# EAGLE board cornMerge (EAGLE 6.1)
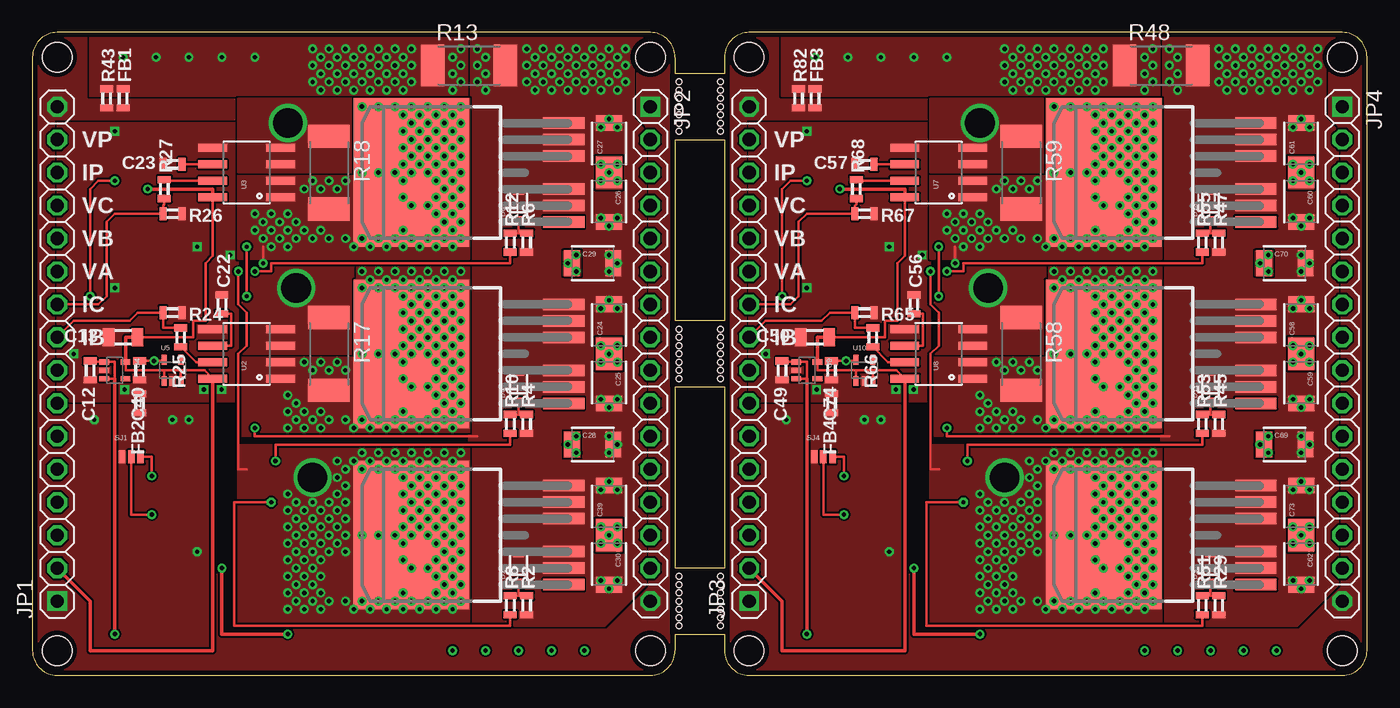
[diagram p0: board, top side]
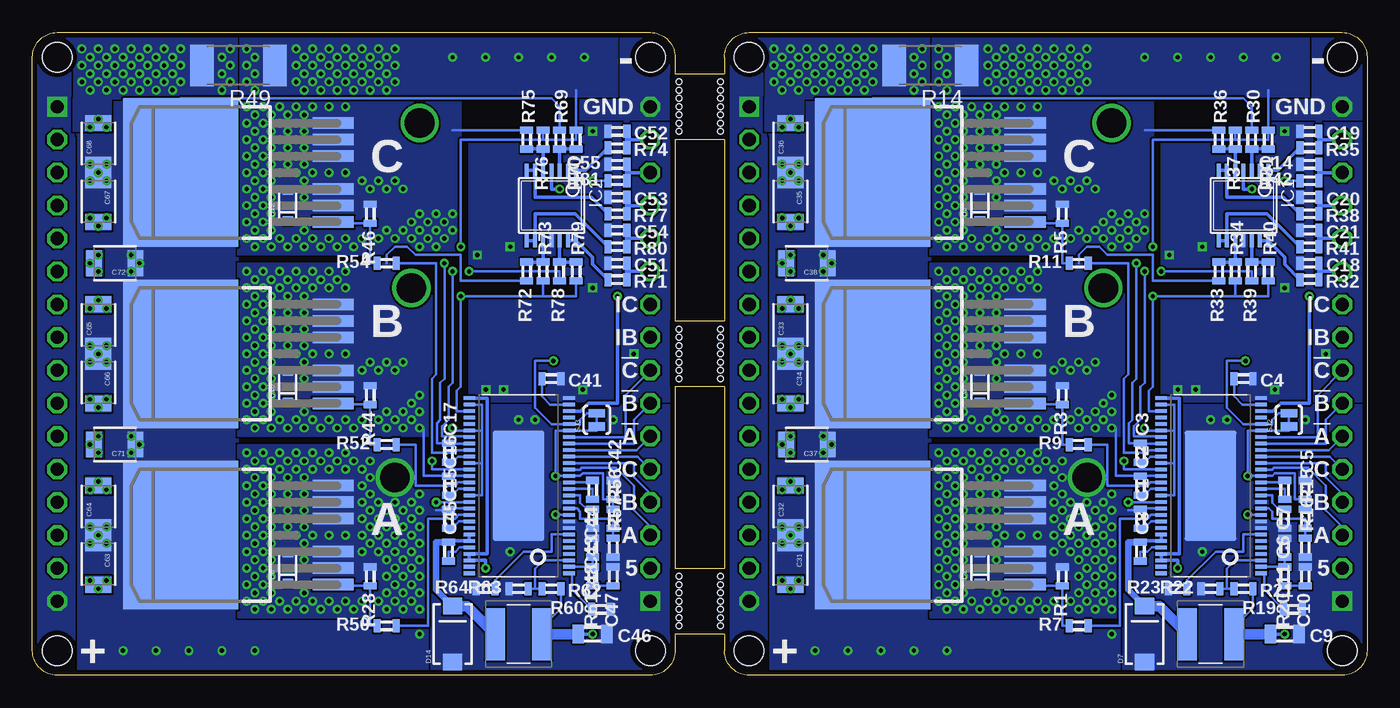
[diagram p1: board, bottom side, seen from below]

Size 102.87 x 49.53 mm. Coordinates in mm from the lower left corner, seen from the top.
Outline: 0,47.62 0,1.91 arc90 1.91,0 47.62,0 arc90 49.53,1.91 49.53,3.17 53.34,3.17 53.34,1.91 arc90 55.24,0 100.97,0 arc90 102.87,1.91 102.87,47.62 arc90 100.97,49.53 55.24,49.53 arc90 53.34,47.62 53.34,46.35 49.53,46.35 49.53,47.62 arc90 47.62,49.53 1.91,49.53 arc90 0,47.62
Outline: 49.53,41.27 53.34,41.27 53.34,27.31 49.53,27.31 49.53,41.27
Outline: 49.53,22.23 53.34,22.23 53.34,8.26 49.53,8.26 49.53,22.23
Copper layers (1*16): Top 0.0356mm / dielectric 1.5011mm / Bottom 0.0356mm
Design rules: minimum track width 6mil, minimum drill 13mil, track to track 6mil, track to pad 6mil, pad to pad 6mil, via to via 6mil, smd to smd 6mil, copper to edge 15mil, drill to drill 6mil, minimum pad ring 7mil, minimum via ring 7mil, stop-mask expansion 4mil, vias tented up to drill 13mil, thermal gap 10mil
Holes 2.29 mm at 1.91,47.62 47.62,47.62 47.62,1.91 1.91,1.91 55.24,47.62 100.97,47.62 100.97,1.91 55.24,1.91
Holes 0.43 mm at 49.85,45.72 49.85,45.09 49.85,44.45 49.85,43.81 49.85,43.18 49.85,42.54 49.85,41.91 53.02,45.72 53.02,44.45 53.02,45.09 53.02,43.81 53.02,43.18 53.02,42.54 53.02,41.91 49.85,26.67 49.85,26.04 49.85,25.4 49.85,24.77 49.85,24.13 49.85,23.5 49.85,22.86 53.02,26.67 53.02,25.4 53.02,26.04 53.02,24.77 53.02,24.13 53.02,23.5 53.02,22.86 49.85,7.62 49.85,6.98 49.85,6.35 49.85,5.71 49.85,5.08 49.85,4.45 49.85,3.81 53.02,7.62 53.02,6.35 53.02,6.98 53.02,5.71 53.02,5.08 53.02,4.45 53.02,3.81
tRestrict: area 49.1,41.3 to 53.7,46.4; area 49.1,22.2 to 53.7,27.3; area 49.1,3.2 to 53.7,8.3
bRestrict: area 49.1,41.3 to 53.7,46.4; area 49.1,22.2 to 53.7,27.3; area 49.1,3.2 to 53.7,8.3

## Footprints (pad centres in the part's own frame; a part is rotated, then mirrored left to right if it is on the bottom)
0603 = smd 0.55 x 1: 1 -0.725,0; 2 0.725,0
0805 = smd 0.9 x 1.4: 1 -1.1,0; 2 1.1,0
1210 = smd 1.2 x 2: 1 -1.6,0; 2 1.6,0
SOD-323 = smd 0.63 x 0.83: 1 -1.15,0; 2 1.15,0
SMA-DIODE = smd 1.27 x 1.47: A -2.15,0; C 2.15,0
TSSOP14 = smd 0.305 x 0.991: 1 -1.905,-2.718; 2 -1.27,-2.718; 3 -0.635,-2.718; 4 0,-2.718; 5 0.635,-2.718; 6 1.27,-2.718; 7 1.905,-2.718; 8 1.905,2.718; 9 1.27,2.718; 10 0.635,2.718; 11 0,2.718; 12 -0.635,2.718; 13 -1.27,2.718; 14 -1.905,2.718
1X16-S = drill 1.016 square: 1 -19.05,0 | drill 1.016 octagon: 2 -16.51,0; 3 -13.97,0; 4 -11.43,0; 5 -8.89,0; 6 -6.35,0; 7 -3.81,0; 8 -1.27,0; 9 1.27,0; 10 3.81,0; 11 6.35,0; 12 8.89,0; 13 11.43,0; 14 13.97,0; 15 16.51,0; 16 19.05,0
TAIYO-YUDEN_NR50 = smd 1.5 x 4: P$1 -1.8,0; P$2 1.8,0
R2512 = smd 1.8 x 3.2: 1 -2.8,0; 2 2.8,0
D2PAK-7 = smd 0.889 x 3.175: 1 -3.81,-7.303; 2 -2.54,-7.303; 3 -1.27,-7.303; 5 1.27,-7.303; 6 2.54,-7.303; 7 3.81,-7.303 | smd 11.43 x 8.89: 4 0,4.445
SJ_X = smd 0.508 x 1.016: 1 -0.711,0; 2 0,0; 3 0.711,0
SJ_2S-TRACE = smd 0.635 x 1.27: 1 -0.508,0; 2 0.508,0
HTSSOP-56 = smd 0.285 x 0.9: 1 -6.75,-3.9; 2 -6.25,-3.9; 3 -5.75,-3.9; 4 -5.25,-3.9; 5 -4.75,-3.9; 6 -4.25,-3.9; 7 -3.75,-3.9; 8 -3.25,-3.9; 9 -2.75,-3.9; 10 -2.25,-3.9; 11 -1.75,-3.9; 12 -1.25,-3.9; 13 -0.75,-3.9; 14 -0.25,-3.9; 15 0.25,-3.9; 16 0.75,-3.9; 17 1.25,-3.9; 18 1.75,-3.9; 19 2.25,-3.9; 20 2.75,-3.9; 21 3.25,-3.9; 22 3.75,-3.9; 23 4.25,-3.9; 24 4.75,-3.9; 25 5.25,-3.9; 26 5.75,-3.9; 27 6.25,-3.9; 28 6.75,-3.9; 29 6.75,3.8; 30 6.25,3.8; 31 5.75,3.8; 32 5.25,3.8; 33 4.75,3.8; 34 4.25,3.8; 35 3.75,3.8; 36 3.25,3.8; 37 2.75,3.8; 38 2.25,3.8; 39 1.75,3.8; 40 1.25,3.8; 41 0.75,3.8; 42 0.25,3.8; 43 -0.25,3.8; 44 -0.75,3.8; 45 -1.25,3.8; 46 -1.75,3.8; 47 -2.25,3.8; 48 -2.75,3.8; 49 -3.25,3.8; 50 -3.75,3.8; 51 -4.25,3.8; 52 -4.75,3.8; 53 -5.25,3.8; 54 -5.75,3.8; 55 -6.25,3.8; 56 -6.75,3.8 | smd 8.5 x 4: PWRPAD 0,0
SO08 = smd 0.61 x 2.21: 1 -1.905,-2.616; 2 -0.635,-2.616; 3 0.635,-2.616; 4 1.905,-2.616; 5 1.905,2.616; 6 0.635,2.616; 7 -0.635,2.616; 8 -1.905,2.616
SC70 = smd 0.4 x 0.75: 1 -0.65,-0.825; 2 0,-0.825; 3 0.65,-0.825; 4 0.65,0.825; 5 -0.65,0.825

## Placement (x,y rotation side)
C1  0.1uF  [0603]  17.46,12.06 90 bottom
C2  0.1uF  [0603]  17.46,14.61 90 bottom
C3  0.1uF  [0603]  17.46,17.15 90 bottom
C4  1uF  [0603]  9.53,22.86 0 bottom
C5  1uF  [0603]  4.76,14.29 90 bottom
C6  2.2uF  [0603]  6.35,12.06 270 bottom
C7  0.022uF  [0603]  6.35,14.29 270 bottom
C8  0.1uF  [0603]  17.46,9.53 90 bottom
C9  22uF  [0805]  6.35,3.17 0 bottom
C10  6800pF  [0603]  4.76,7.62 270 bottom
C11  120pF  [0603]  6.35,9.84 270 bottom
C12  1uF  [0603]  4.45,23.5 270 top
C13  22uF  [0805]  6.98,26.04 180 top
C14  0.1uF  [0603]  4.45,39.37 180 bottom
C15  0.1uF  [0603]  70.8,12.06 90 bottom
C16  0.1uF  [0603]  70.8,14.61 90 bottom
C17  0.1uF  [0603]  70.8,17.15 90 bottom
C18  10000pF  [0603]  4.45,31.75 0 bottom
C19  0.1uF  [0603]  4.45,41.91 0 bottom
C20  10000pF  [0603]  4.45,36.83 0 bottom
C21  10000pF  [0603]  4.45,34.29 0 bottom
C22  0.1uF  [0603]  14.61,28.58 90 top
C23  0.1uF  [0603]  10.79,39.37 180 top
C24  10uF  [1210]  44.45,26.99 90 top
C25  10uF  [1210]  44.45,22.54 270 top
C26  10uF  [1210]  44.45,36.51 270 top
C27  10uF  [1210]  44.45,40.96 90 top
C28  10uF  [1210]  43.18,17.78 0 top
C29  10uF  [1210]  43.18,31.75 0 top
C30  10uF  [1210]  44.45,8.57 270 top
C31  10uF  [1210]  44.45,8.57 270 bottom
C32  10uF  [1210]  44.45,13.02 90 bottom
C33  10uF  [1210]  44.45,26.99 90 bottom
C34  10uF  [1210]  44.45,22.54 270 bottom
C35  10uF  [1210]  44.45,36.51 270 bottom
C36  10uF  [1210]  44.45,40.96 90 bottom
C37  10uF  [1210]  43.18,17.78 180 bottom
C38  10uF  [1210]  43.18,31.75 180 bottom
C39  10uF  [1210]  44.45,13.02 90 top
C40  10uF  [0603]  8.26,23.5 270 top
C41  1uF  [0603]  62.86,22.86 0 bottom
C42  1uF  [0603]  58.1,14.29 90 bottom
C43  2.2uF  [0603]  59.69,12.06 270 bottom
C44  0.022uF  [0603]  59.69,14.29 270 bottom
C45  0.1uF  [0603]  70.8,9.53 90 bottom
C46  22uF  [0805]  59.69,3.17 0 bottom
C47  6800pF  [0603]  58.1,7.62 270 bottom
C48  120pF  [0603]  59.69,9.84 270 bottom
C49  1uF  [0603]  57.78,23.5 270 top
C50  22uF  [0805]  60.32,26.04 180 top
C51  10000pF  [0603]  57.78,31.75 0 bottom
C52  0.1uF  [0603]  57.78,41.91 0 bottom
C53  10000pF  [0603]  57.78,36.83 0 bottom
C54  10000pF  [0603]  57.78,34.29 0 bottom
C55  0.1uF  [0603]  57.78,39.37 180 bottom
C56  0.1uF  [0603]  67.95,28.58 90 top
C57  0.1uF  [0603]  64.14,39.37 180 top
C58  10uF  [1210]  97.79,26.99 90 top
C59  10uF  [1210]  97.79,22.54 270 top
C60  10uF  [1210]  97.79,36.51 270 top
C61  10uF  [1210]  97.79,40.96 90 top
C62  10uF  [1210]  97.79,8.57 270 top
C63  10uF  [1210]  97.79,8.57 270 bottom
C64  10uF  [1210]  97.79,13.02 90 bottom
C65  10uF  [1210]  97.79,26.99 90 bottom
C66  10uF  [1210]  97.79,22.54 270 bottom
C67  10uF  [1210]  97.79,36.51 270 bottom
C68  10uF  [1210]  97.79,40.96 90 bottom
C69  10uF  [1210]  96.52,17.78 0 top
C70  10uF  [1210]  96.52,31.75 0 top
C71  10uF  [1210]  96.52,17.78 180 bottom
C72  10uF  [1210]  96.52,31.75 180 bottom
C73  10uF  [1210]  97.79,13.02 90 top
C74  10uF  [0603]  61.59,23.5 270 top
D1  ZENER  [SOD-323]  29.85,8.26 90 bottom
D2  ZENER  [SOD-323]  37.46,8.26 90 top
D3  ZENER  [SOD-323]  29.85,22.23 90 bottom
D4  ZENER  [SOD-323]  37.46,22.23 90 top
D5  ZENER  [SOD-323]  29.85,36.2 90 bottom
D6  ZENER  [SOD-323]  37.46,36.2 90 top
D7  [SMA-DIODE]  17.15,3.17 90 bottom
D8  ZENER  [SOD-323]  83.19,8.26 90 bottom
D9  ZENER  [SOD-323]  90.81,8.26 90 top
D10  ZENER  [SOD-323]  83.19,22.23 90 bottom
D11  ZENER  [SOD-323]  90.81,22.23 90 top
D12  ZENER  [SOD-323]  83.19,36.2 90 bottom
D13  ZENER  [SOD-323]  90.81,36.2 90 top
D14  [SMA-DIODE]  70.48,3.17 90 bottom
FB1  [0603]  6.98,44.45 90 top
FB2  [0603]  8.26,20.96 270 top
FB3  [0603]  60.32,44.45 90 top
FB4  [0603]  61.59,20.96 270 top
IC1  OPA4743EA  [TSSOP14]  9.53,36.2 180 bottom
IC2  OPA4743EA  [TSSOP14]  62.86,36.2 180 bottom
JP1  [1X16-S]  1.91,24.77 90 top
JP2  [1X16-S]  47.62,24.77 270 top
JP3  [1X16-S]  55.24,24.77 90 top
JP4  [1X16-S]  100.97,24.77 270 top
L1  22uH  [TAIYO-YUDEN_NR50]  12.06,3.17 180 bottom
L2  22uH  [TAIYO-YUDEN_NR50]  65.41,3.17 180 bottom
R1  22k  [0603]  23.5,7.62 270 bottom
R2  22k  [0603]  38.1,5.4 90 top
R3  22k  [0603]  23.5,21.59 270 bottom
R4  22k  [0603]  38.1,19.37 90 top
R5  22k  [0603]  23.5,35.56 270 bottom
R6  22k  [0603]  38.1,33.34 90 top
R7  0R  [0603]  22.23,3.81 180 bottom
R8  0R  [0603]  36.83,5.4 90 top
R9  0R  [0603]  22.23,17.78 180 bottom
R10  0R  [0603]  36.83,19.37 90 top
R11  0R  [0603]  22.23,31.75 180 bottom
R12  0R  [0603]  36.83,33.34 90 top
R13  1mR  [R2512]  33.66,46.99 0 top
R14  1mR  [R2512]  33.66,46.99 180 bottom
R15  91k  [0603]  4.76,12.06 90 bottom
R16  12k  [0603]  4.76,9.84 90 bottom
R17  1mR  [R2512]  22.86,24.77 270 top
R18  1mR  [R2512]  22.86,38.73 270 top
R19  205k  [0603]  5.71,5.08 180 bottom
R20  16.2k  [0603]  6.35,7.62 270 bottom
R21  59k  [0603]  9.53,6.67 0 bottom
R22  10k  [0603]  12.06,6.67 180 bottom
R23  22k  [0603]  14.61,6.67 180 bottom
R24  330R  [0603]  10.79,27.94 0 top
R25  1K  [0603]  11.43,26.04 270 top
R26  330R  [0603]  10.79,35.56 0 top
R27  1K  [0603]  10.16,37.46 90 top
R28  22k  [0603]  76.84,7.62 270 bottom
R29  22k  [0603]  91.44,5.4 90 top
R30  6.8K  [0603]  8.89,41.27 90 bottom
R31  330R  [0603]  7.62,41.27 270 bottom
R32  6.8K  [0603]  4.45,30.48 0 bottom
R33  6.8K  [0603]  11.43,31.12 270 bottom
R34  330R  [0603]  10.16,31.12 90 bottom
R35  6.8K  [0603]  4.45,40.64 0 bottom
R36  6.8K  [0603]  11.43,41.27 90 bottom
R37  330R  [0603]  10.16,41.27 270 bottom
R38  6.8K  [0603]  4.45,35.56 0 bottom
R39  6.8K  [0603]  8.89,31.12 270 bottom
R40  330R  [0603]  7.62,31.12 90 bottom
R41  6.8K  [0603]  4.45,33.02 0 bottom
R42  22k  [0603]  4.45,38.1 180 bottom
R43  [0603]  5.71,44.45 90 top
R44  22k  [0603]  76.84,21.59 270 bottom
R45  22k  [0603]  91.44,19.37 90 top
R46  22k  [0603]  76.84,35.56 270 bottom
R47  22k  [0603]  91.44,33.34 90 top
R48  1mR  [R2512]  87,46.99 0 top
R49  1mR  [R2512]  87,46.99 180 bottom
R50  0R  [0603]  75.57,3.81 180 bottom
R51  0R  [0603]  90.17,5.4 90 top
R52  0R  [0603]  75.57,17.78 180 bottom
R53  0R  [0603]  90.17,19.37 90 top
R54  0R  [0603]  75.57,31.75 180 bottom
R55  0R  [0603]  90.17,33.34 90 top
R56  91k  [0603]  58.1,12.06 90 bottom
R57  12k  [0603]  58.1,9.84 90 bottom
R58  1mR  [R2512]  76.2,24.77 270 top
R59  1mR  [R2512]  76.2,38.73 270 top
R60  205k  [0603]  59.05,5.08 180 bottom
R61  16.2k  [0603]  59.69,7.62 270 bottom
R62  59k  [0603]  62.86,6.67 0 bottom
R63  10k  [0603]  65.41,6.67 180 bottom
R64  22k  [0603]  67.95,6.67 180 bottom
R65  330R  [0603]  64.14,27.94 0 top
R66  1K  [0603]  64.77,26.04 270 top
R67  330R  [0603]  64.14,35.56 0 top
R68  1K  [0603]  63.5,37.46 90 top
R69  6.8K  [0603]  62.23,41.27 90 bottom
R70  330R  [0603]  60.96,41.27 270 bottom
R71  6.8K  [0603]  57.78,30.48 0 bottom
R72  6.8K  [0603]  64.77,31.12 270 bottom
R73  330R  [0603]  63.5,31.12 90 bottom
R74  6.8K  [0603]  57.78,40.64 0 bottom
R75  6.8K  [0603]  64.77,41.27 90 bottom
R76  330R  [0603]  63.5,41.27 270 bottom
R77  6.8K  [0603]  57.78,35.56 0 bottom
R78  6.8K  [0603]  62.23,31.12 270 bottom
R79  330R  [0603]  60.96,31.12 90 bottom
R80  6.8K  [0603]  57.78,33.02 0 bottom
R81  22k  [0603]  57.78,38.1 180 bottom
R82  [0603]  59.05,44.45 90 top
S_AH  D2PAK-7  [D2PAK-7]  33.66,10.79 90 bottom
S_AH1  D2PAK-7  [D2PAK-7]  87,10.79 90 bottom
S_AL  D2PAK-7  [D2PAK-7]  33.66,10.79 90 top
S_AL1  D2PAK-7  [D2PAK-7]  87,10.79 90 top
S_BH  D2PAK-7  [D2PAK-7]  33.66,24.77 90 bottom
S_BH1  D2PAK-7  [D2PAK-7]  87,24.77 90 bottom
S_BL  D2PAK-7  [D2PAK-7]  33.66,24.77 90 top
S_BL1  D2PAK-7  [D2PAK-7]  87,24.77 90 top
S_CH  D2PAK-7  [D2PAK-7]  33.66,38.73 90 bottom
S_CH1  D2PAK-7  [D2PAK-7]  87,38.73 90 bottom
S_CL  D2PAK-7  [D2PAK-7]  33.66,38.73 90 top
S_CL1  D2PAK-7  [D2PAK-7]  87,38.73 90 top
SJ1  [SJ_X]  7.62,16.83 0 top
SJ2  [SJ_2S-TRACE]  6.03,19.69 90 bottom
SJ3  [SJ_2S-TRACE]  59.37,19.69 90 bottom
SJ4  [SJ_X]  60.96,16.83 0 top
U1  DRV8302  [HTSSOP-56]  12.06,14.61 90 bottom
U2  ACS712  [SO08]  16.51,24.77 90 top
U3  ACS712  [SO08]  16.51,38.73 90 top
U4  V_REG_LDOSMD2  [SC70]  6.35,23.5 270 top
U5  V_REG_LDOSMD2  [SC70]  10.79,23.5 0 top
U6  DRV8302  [HTSSOP-56]  65.41,14.61 90 bottom
U7  ACS712  [SO08]  69.85,38.73 90 top
U8  ACS712  [SO08]  69.85,24.77 90 top
U9  V_REG_LDOSMD2  [SC70]  59.69,23.5 270 top
U10  V_REG_LDOSMD2  [SC70]  64.14,23.5 0 top

## Library data of the parts
C1-C23 C40-C57 C74 FB1-FB4 R1-R12 R15 R16 R19-R47 R50-R57 R60-R82 = dan-rcl
C24-C39 C58-C73 D1-D14 R13 R14 R17 R18 R48 R49 R58 R59 SJ2 SJ3 U2-U5 U7-U10 = SparkFun
IC1 IC2 = linear
JP1-JP4 = pinhead-2
L1 L2 S_AH S_AH1 S_AL S_AL1 S_BH S_BH1 S_BL S_BL1 S_CH S_CH1 S_CL S_CL1 SJ1 SJ4 U1 U6 = xow

## Nets
!PWM_A: JP1.4 U1.18
!PWM_A1: JP3.4 U6.18
!PWM_B: JP1.6 U1.20
!PWM_B1: JP3.6 U6.20
!PWM_C: JP1.8 U1.22
!PWM_C1: JP3.8 U6.22
+3V1: C74.1 SJ3.2 U6.24 U10.5
+3V3: C40.1 SJ2.2 U1.24 U5.5
+5V: C13.1 IC1.4 JP1.2 U2.8 U3.8 U4.5 U5.1 U5.3
+5V1: C50.1 IC2.4 JP3.2 U7.8 U8.8 U9.5 U10.1 U10.3
AGND: C4.2 C12.2 C13.2 C14.2 C18.1 C19.1 C20.1 C21.1 C22.2 C23.2 C40.2 FB2.1 IC1.11 R24.2 R26.2 U1.28 U2.5 U3.5 U4.2 U5.2
AGND1: C41.2 C49.2 C50.2 C51.1 C52.1 C53.1 C54.1 C55.2 C56.2 C57.2 C74.2 FB4.1 IC2.11 R65.2 R67.2 U6.28 U7.5 U8.5 U9.2 U10.2
GND: C5.2 C6.2 C9.2 C10.1 C11.1 D7.A FB1.1 FB2.2 JP1.1 JP1.16 JP2.1 JP2.16 R16.1 R19.1 R22.2 R23.2 R43.1 SJ1.1 U1.8 U1.9 U1.12 U1.PWRPAD
GND2: C42.2 C43.2 C46.2 C47.1 C48.1 D14.A FB3.1 FB4.2 JP3.1 JP3.16 JP4.1 JP4.16 R57.1 R60.1 R63.2 R64.2 R82.1 SJ4.1 U6.8 U6.9 U6.12 U6.PWRPAD
I_A: JP1.9 R24.1 R25.1
I_A1: JP3.9 R65.1 R66.1
I_B: JP1.10 R26.1 R27.1
I_B1: JP3.10 R67.1 R68.1
I_B_5V: R25.2 U2.7
I_B_5V1: R66.2 U8.7
I_C_5V: R27.2 U3.7
I_C_5V1: R68.2 U7.7
I_P: C14.1 JP1.14 R42.1
I_P1: C55.1 JP3.14 R81.1
M_A: C1.2 D1.2 R1.1 R39.2 S_AH.2 S_AH.3 S_AH.5 S_AH.6 S_AH.7 S_AL.4 U1.46
M_A1: C15.2 D8.2 R28.1 R78.2 S_AH1.2 S_AH1.3 S_AH1.5 S_AH1.6 S_AH1.7 S_AL1.4 U6.46
M_B: R17.1 U2.3 U2.4
M_B1: R58.1 U8.3 U8.4
M_C: R18.1 U3.3 U3.4
M_C1: R59.1 U7.3 U7.4
N$1: R7.1 U1.47
N$2: R8.1 U1.45
N$3: R42.2 U1.26
N$4: D1.1 R1.2 R7.2 S_AH.1
N$5: D3.1 R3.2 R9.2 S_BH.1
N$6: C22.1 U2.6
N$7: D4.1 R4.2 R10.2 S_BL.1
N$8: R21.1 R22.1 U1.3
N$9: D5.1 R5.2 R11.2 S_CH.1
N$10: C23.1 U3.6
N$11: D6.1 R6.2 R12.2 S_CL.1
N$12: R9.1 U1.42
N$13: C1.1 U1.48
N$14: C2.1 U1.43
N$15: C3.1 U1.38
N$16: R10.1 U1.40
N$17: R11.1 U1.37
N$18: D2.1 R2.2 R8.2 S_AL.1
N$19: R12.1 U1.35
N$20: SJ1.2 U1.10
N$21: C5.1 R15.2 SJ1.3 SJ2.1 U1.16 U1.23
N$22: C4.1 U1.27
N$23: C6.1 U1.13
N$24: C7.2 U1.14
N$25: C7.1 U1.15
N$26: R15.1 R16.2 U1.11
N$27: D8.1 R28.2 R50.2 S_AH1.1
N$28: D10.1 R44.2 R52.2 S_BH1.1
N$29: C8.2 D7.C L1.P$2 U1.50 U1.51
N$30: C8.1 U1.52
N$31: C11.2 R20.1 U1.2
N$32: C10.2 R20.2
N$33: R19.2 U1.1
N$34: R23.1 U1.7
N$35: D11.1 R45.2 R53.2 S_BL1.1
N$36: IC1.1 IC1.2 R35.1
N$37: D12.1 R46.2 R54.2 S_CH1.1
N$38: D13.1 R47.2 R55.2 S_CL1.1
N$39: C15.1 U6.48
N$40: C16.1 U6.43
N$41: IC1.6 IC1.7 R38.1
N$42: IC1.8 IC1.9 R41.1
N$43: IC1.13 IC1.14 R32.1
N$44: IC1.3 R30.1 R31.2
N$45: C17.1 U6.38
N$46: IC1.10 R33.1 R34.2
N$47: IC1.5 R36.1 R37.2
N$48: IC1.12 R39.1 R40.2
N$49: D9.1 R29.2 R51.2 S_AL1.1
N$50: R50.1 U6.47
N$51: R51.1 U6.45
N$52: R52.1 U6.42
N$53: R53.1 U6.40
N$54: R54.1 U6.37
N$55: R55.1 U6.35
N$56: SJ4.2 U6.10
N$57: C42.1 R56.2 SJ3.1 SJ4.3 U6.16 U6.23
N$58: C41.1 U6.27
N$59: C43.1 U6.13
N$60: C44.2 U6.14
N$61: C44.1 U6.15
N$62: R56.1 R57.2 U6.11
N$63: C45.2 D14.C L2.P$2 U6.50 U6.51
N$64: C45.1 U6.52
N$65: C48.2 R61.1 U6.2
N$66: C47.2 R61.2
N$67: R60.2 U6.1
N$68: R62.1 R63.1 U6.3
N$69: R64.1 U6.7
N$70: IC2.1 IC2.2 R74.1
N$71: IC2.6 IC2.7 R77.1
N$72: IC2.8 IC2.9 R80.1
N$73: IC2.13 IC2.14 R71.1
N$74: IC2.3 R69.1 R70.2
N$75: IC2.10 R72.1 R73.2
N$76: IC2.5 R75.1 R76.2
N$77: IC2.12 R78.1 R79.2
N$78: R81.2 U6.26
N$79: C56.1 U8.6
N$80: C57.1 U7.6
PWM_A: JP1.3 U1.17
PWM_A1: JP3.3 U6.17
PWM_B: JP1.5 U1.19
PWM_B1: JP3.5 U6.19
PWM_C: JP1.7 U1.21
PWM_C1: JP3.7 U6.21
R_B: C2.2 D3.2 R3.1 R17.2 R33.2 S_BH.2 S_BH.3 S_BH.5 S_BH.6 S_BH.7 S_BL.4 U1.41 U2.1 U2.2
R_B1: C16.2 D10.2 R44.1 R58.2 R72.2 S_BH1.2 S_BH1.3 S_BH1.5 S_BH1.6 S_BH1.7 S_BL1.4 U6.41 U8.1 U8.2
R_C: C3.2 D5.2 R5.1 R18.2 R36.2 S_CH.2 S_CH.3 S_CH.5 S_CH.6 S_CH.7 S_CL.4 U1.36 U3.1 U3.2
R_C1: C17.2 D12.2 R46.1 R59.2 R75.2 S_CH1.2 S_CH1.3 S_CH1.5 S_CH1.6 S_CH1.7 S_CL1.4 U6.36 U7.1 U7.2
V+: C24.1 C25.1 C26.1 C27.1 C28.1 C29.1 C30.1 C31.1 C32.1 C33.1 C34.1 C35.1 C36.1 C37.1 C38.1 C39.1 R30.2 S_AH.4 S_BH.4 S_CH.4 U1.29 U1.53 U1.54
V+1: C58.1 C59.1 C60.1 C61.1 C62.1 C63.1 C64.1 C65.1 C66.1 C67.1 C68.1 C69.1 C70.1 C71.1 C72.1 C73.1 R69.2 S_AH1.4 S_BH1.4 S_CH1.4 U6.29 U6.53 U6.54
V-: FB1.2 R13.1 R14.1 R31.1 R34.1 R37.1 R40.1 R43.2 U1.31
V-1: FB3.2 R48.1 R49.1 R70.1 R73.1 R76.1 R79.1 R82.2 U6.31
V_A: C18.2 JP1.11 R32.2
V_A1: C51.2 JP3.11 R71.2
V_B: C21.2 JP1.12 R41.2
V_B1: C54.2 JP3.12 R80.2
V_C: C20.2 JP1.13 R38.2
V_C1: C53.2 JP3.13 R77.2
V_LOW: C24.2 C25.2 C26.2 C27.2 C28.2 C29.2 C30.2 C31.2 C32.2 C33.2 C34.2 C35.2 C36.2 C37.2 C38.2 C39.2 D2.2 D4.2 D6.2 R2.1 R4.1 R6.1 R13.2 R14.2 S_AL.2 S_AL.3 S_AL.5 S_AL.6 S_AL.7 S_BL.2 S_BL.3 S_BL.5 S_BL.6 S_BL.7 S_CL.2 S_CL.3 S_CL.5 S_CL.6 S_CL.7 U1.30 U1.34 U1.39 U1.44
V_LOW1: C58.2 C59.2 C60.2 C61.2 C62.2 C63.2 C64.2 C65.2 C66.2 C67.2 C68.2 C69.2 C70.2 C71.2 C72.2 C73.2 D9.2 D11.2 D13.2 R29.1 R45.1 R47.1 R48.2 R49.2 S_AL1.2 S_AL1.3 S_AL1.5 S_AL1.6 S_AL1.7 S_BL1.2 S_BL1.3 S_BL1.5 S_BL1.6 S_BL1.7 S_CL1.2 S_CL1.3 S_CL1.5 S_CL1.6 S_CL1.7 U6.30 U6.34 U6.39 U6.44
V_P: C19.2 JP1.15 R35.2
V_P1: C52.2 JP3.15 R74.2
VCC: C9.1 C12.1 L1.P$1 R21.2 U4.1 U4.3
VCC1: C46.1 C49.1 L2.P$1 R62.2 U9.1 U9.3

## Tracks (layer width: path | path; a pad name or v marks a point on that pad's centre or on a via)
!PWM_A
  Bottom 0.203: JP1.4 1.91,13.97 3.17,15.24 3.17,16.36 U1.18 7.3,16.36
!PWM_A1
  Bottom 0.203: JP3.4 55.24,13.97 56.52,15.24 56.52,16.36 U6.18 60.64,16.36
!PWM_B
  Bottom 0.203: JP1.6 2.96,17.36 U1.20
!PWM_B1
  Bottom 0.203: JP3.6 56.3,17.36 U6.20
!PWM_C
  Bottom 0.203: JP1.8 3.81,21.59 3.81,18.36 U1.22
!PWM_C1
  Bottom 0.203: JP3.8 57.15,21.59 57.15,18.36 U6.22
+3V1  (via drill 0.33)
  Top 0.203: C74.1 v62.71,24.22 63.48,24.22 U10.5
  Bottom 0.203: v62.71,24.22 64.14,24.22 64.14,20.62 62.86,19.36 U6.24 60.64,19.36 60.64,19.69 60.13,20.19 SJ3.2
+3V3  (via drill 0.33)
  Top 0.203: C40.1 v9.37,24.22 10.14,24.22 U5.5
  Bottom 0.203: v9.37,24.22 10.79,24.22 10.79,20.62 9.53,19.36 U1.24 7.3,19.36 7.3,19.69 6.79,20.19 SJ2.2
+5V  (via drill 0.33)
  Top 0.203: U4.5 7.17,23.5 10.14,23.5 | U2.8 13.26,23.5 11.45,23.5 | C13.1 12.38,26.04 12.38,27.31 13.33,27.31 13.33,31.75 13.89,32.31 U3.8 | 10.14,23.5 U5.1 | 10.14,23.5 11.45,23.5 | 11.45,23.5 U5.3
  Top 0.254: JP1.2 4.45,5.71 4.45,1.91 13.89,1.91 U2.8 | U3.8 13.89,37.46 v8.89,37.46 | C13.1 7.17,26.04 U4.5
  Bottom 0.254: IC1.4 9.53,37.46 v8.89,37.46
+5V1  (via drill 0.33)
  Top 0.203: U9.5 60.52,23.5 63.48,23.5 | U8.8 66.6,23.5 64.79,23.5 | C50.1 65.72,26.04 65.72,27.31 66.68,27.31 66.68,31.75 67.23,32.31 U7.8 | 63.48,23.5 U10.1 | 63.48,23.5 64.79,23.5 | 64.79,23.5 U10.3
  Top 0.254: JP3.2 57.78,5.71 57.78,1.91 67.23,1.91 U8.8 | U7.8 67.23,37.46 v62.23,37.46 | C50.1 60.52,26.04 U9.5
  Bottom 0.254: IC2.4 62.86,37.46 v62.23,37.46
AGND  (via drill 0.33)
  other vias: 3.17,24.77 15.24,32.38 12.7,33.02 6.35,29.85 6.35,41.91 7.11,22.01 14.58,22.02 13.21,22.02
  pour Bottom (rank 5, no thermals): 0,42.54 15.88,42.54 15.88,21.11 0,21.11
  pour Top (rank 5, no thermals): 1.91,42.54 1.91,21.11 15.88,21.11 15.88,42.54
AGND1  (via drill 0.33)
  other vias: 56.52,24.77 68.58,32.38 66.04,33.02 59.69,29.85 59.69,41.91 60.45,22.01 67.92,22.02 66.55,22.02
  pour Bottom (rank 5, no thermals): 53.34,42.54 69.22,42.54 69.22,21.11 53.34,21.11
  pour Top (rank 5, no thermals): 55.24,42.54 55.24,21.11 69.22,21.11 69.22,42.54
GND  (via drill 0.33)
  other vias: 12.7,9.53 12.06,19.69 10.79,19.69 4.76,19.69
  pour Bottom (rank 6, no thermals): 47.62,0 1.91,0 arc-90 0,1.91 0,47.62 arc-90 1.91,49.53 47.62,49.53 arc-90 49.53,47.62 49.53,1.91 arc-90
  pour Top (rank 6, no thermals): 47.62,0 1.91,0 arc-90 0,1.91 0,47.62 arc-90 1.91,49.53 47.62,49.53 arc-90 49.53,47.62 49.53,1.91 arc-90
GND2  (via drill 0.33)
  other vias: 66.04,9.53 65.41,19.69 64.14,19.69 58.1,19.69
  pour Bottom (rank 6, no thermals): 100.97,0 55.24,0 arc-90 53.34,1.91 53.34,47.62 arc-90 55.24,49.53 100.97,49.53 arc-90 102.87,47.62 102.87,1.91 arc-90
  pour Top (rank 6, no thermals): 100.97,0 55.24,0 arc-90 53.34,1.91 53.34,47.62 arc-90 55.24,49.53 100.97,49.53 arc-90 102.87,47.62 102.87,1.91 arc-90
I_A
  Top 0.203: JP1.9 3.17,27.31 7.49,27.31 8.12,27.94 R24.1 10.07,26.76 R25.1
I_A1
  Top 0.203: JP3.9 56.52,27.31 60.83,27.31 61.46,27.94 R65.1 63.41,26.76 R66.1
I_B
  Top 0.203: JP1.10 5.08,28.58 5.71,29.21 5.71,34.92 6.35,35.56 R26.1 10.07,36.2 10.16,36.28 R27.1
I_B1
  Top 0.203: JP3.10 58.42,28.58 59.05,29.21 59.05,34.92 59.69,35.56 R67.1 63.41,36.2 63.5,36.28 R68.1
I_B_5V
  Top 0.203: R25.2 12.61,24.13 U2.7
I_B_5V1
  Top 0.203: R66.2 65.95,24.13 U8.7
I_C_5V
  Top 0.203: U3.7 10.16,38.1 R27.2
I_C_5V1
  Top 0.203: U7.7 63.5,38.1 R68.2
I_P
  Bottom 0.254: C14.1 3.72,38.73 | 3.72,38.73 JP1.14 | 3.72,38.73 R42.1
I_P1
  Bottom 0.254: C55.1 57.06,38.73 | 57.06,38.73 JP3.14 | 57.06,38.73 R81.1
M_A  (via drill 0.33, 2.29)
  Top 0.203: v15.88,31.12 15.88,28.58 16.51,27.94 16.51,25.4 15.88,24.77 15.88,15.88 16.51,15.88
  Bottom 0.203: U1.46 17.08,12.86 C1.2 17.15,12.7 18.42,12.7 | R39.2 8.89,31.12 v15.88,31.12
  other vias: 33.02,17.15 32.38,16.51 33.02,15.88 32.38,15.24 33.02,14.61 32.38,13.97 33.02,13.33 32.38,12.7 33.02,12.06 32.38,11.43 33.02,10.79 32.38,10.16 33.02,9.53 32.38,8.89 33.02,8.26 32.38,7.62 33.02,6.98 32.38,6.35 33.02,5.71 31.75,17.15 31.12,16.51 31.75,15.88 31.12,15.24 31.75,14.61 31.12,13.97 31.75,13.33 31.12,12.7 31.75,12.06 31.12,11.43 31.75,10.79 31.12,10.16 31.75,9.53 31.12,8.89 31.75,8.26 31.12,7.62 31.75,6.98 31.12,6.35 31.75,5.71 21.59,13.33 20.96,12.7 21.59,12.06 20.96,11.43 21.59,10.79 20.96,10.16 21.59,9.53 20.96,8.89 21.59,8.26 20.96,7.62 21.59,6.98 20.96,6.35 21.59,5.71 19.69,13.97 20.32,13.33 19.69,12.7 20.32,12.06 19.69,11.43 20.32,10.79 19.69,10.16 20.32,9.53 19.69,8.89 20.32,8.26 19.69,7.62 20.32,6.98 19.69,6.35 20.32,5.71 22.86,13.33 22.23,12.7 22.86,12.06 22.23,11.43 22.86,10.79 22.23,10.16 22.86,9.53 22.23,8.89 22.23,7.62 22.23,6.35 22.86,5.71 23.5,16.51 24.13,15.88 23.5,15.24 24.13,14.61 23.5,13.97 24.13,13.33 23.5,12.7 24.13,12.06 23.5,11.43 24.13,10.79 23.5,10.16 24.13,9.53 30.48,17.15 29.85,16.51 30.48,15.88 29.85,15.24 30.48,14.61 29.85,13.97 30.48,13.33 29.85,12.7 30.48,12.06 29.85,11.43 30.48,10.79 29.21,17.15 28.58,16.51 29.21,15.88 28.58,15.24 29.21,14.61 28.58,13.97 29.21,13.33 28.58,12.7 29.21,12.06 28.58,11.43 29.21,10.79 28.58,10.16 28.58,8.89 30.48,8.26 29.21,8.26 30.48,5.71 29.21,5.71 28.58,6.35 27.94,5.71 26.67,5.71 25.4,5.71 24.13,5.71 27.94,10.79 26.67,10.79 25.4,10.79 27.94,17.15 27.31,16.51 26.67,17.15 26.04,16.51 25.4,17.15 24.77,16.51 25.4,15.88 26.67,15.88 27.94,15.88 19.69,5.08 20.96,5.08 22.23,5.08 24.77,5.08 26.04,5.08 27.31,5.08 28.58,5.08 29.85,5.08 31.12,5.08 32.38,5.08 21.59,15.24
  pour Bottom (rank 2, no thermals): 33.66,17.78 20,17.78 20,14.61 17.78,14.61 17.78,12.06 19.05,12.06 19.05,4.45 33.66,4.45
  pour Top (rank 2, no thermals): 15.88,17.78 33.66,17.78 33.66,3.81 15.88,3.81
M_A1  (via drill 0.33, 2.29)
  Top 0.203: v69.22,31.12 69.22,28.58 69.85,27.94 69.85,25.4 69.22,24.77 69.22,15.88 69.85,15.88
  Bottom 0.203: U6.46 70.42,12.86 C15.2 70.48,12.7 71.76,12.7 | R78.2 62.23,31.12 v69.22,31.12
  other vias: 86.36,17.15 85.73,16.51 86.36,15.88 85.73,15.24 86.36,14.61 85.73,13.97 86.36,13.33 85.73,12.7 86.36,12.06 85.73,11.43 86.36,10.79 85.73,10.16 86.36,9.53 85.73,8.89 86.36,8.26 85.73,7.62 86.36,6.98 85.73,6.35 86.36,5.71 85.09,17.15 84.45,16.51 85.09,15.88 84.45,15.24 85.09,14.61 84.45,13.97 85.09,13.33 84.45,12.7 85.09,12.06 84.45,11.43 85.09,10.79 84.45,10.16 85.09,9.53 84.45,8.89 85.09,8.26 84.45,7.62 85.09,6.98 84.45,6.35 85.09,5.71 74.93,13.33 74.3,12.7 74.93,12.06 74.3,11.43 74.93,10.79 74.3,10.16 74.93,9.53 74.3,8.89 74.93,8.26 74.3,7.62 74.93,6.98 74.3,6.35 74.93,5.71 73.03,13.97 73.66,13.33 73.03,12.7 73.66,12.06 73.03,11.43 73.66,10.79 73.03,10.16 73.66,9.53 73.03,8.89 73.66,8.26 73.03,7.62 73.66,6.98 73.03,6.35 73.66,5.71 76.2,13.33 75.57,12.7 76.2,12.06 75.57,11.43 76.2,10.79 75.57,10.16 76.2,9.53 75.57,8.89 75.57,7.62 75.57,6.35 76.2,5.71 76.84,16.51 77.47,15.88 76.84,15.24 77.47,14.61 76.84,13.97 77.47,13.33 76.84,12.7 77.47,12.06 76.84,11.43 77.47,10.79 76.84,10.16 77.47,9.53 83.82,17.15 83.19,16.51 83.82,15.88 83.19,15.24 83.82,14.61 83.19,13.97 83.82,13.33 83.19,12.7 83.82,12.06 83.19,11.43 83.82,10.79 82.55,17.15 81.92,16.51 82.55,15.88 81.92,15.24 82.55,14.61 81.92,13.97 82.55,13.33 81.92,12.7 82.55,12.06 81.92,11.43 82.55,10.79 81.92,10.16 81.92,8.89 83.82,8.26 82.55,8.26 83.82,5.71 82.55,5.71 81.92,6.35 81.28,5.71 80.01,5.71 78.74,5.71 77.47,5.71 81.28,10.79 80.01,10.79 78.74,10.79 81.28,17.15 80.65,16.51 80.01,17.15 79.38,16.51 78.74,17.15 78.11,16.51 78.74,15.88 80.01,15.88 81.28,15.88 73.03,5.08 74.3,5.08 75.57,5.08 78.11,5.08 79.38,5.08 80.65,5.08 81.92,5.08 83.19,5.08 84.45,5.08 85.73,5.08 74.93,15.24
  pour Bottom (rank 2, no thermals): 87,17.78 73.34,17.78 73.34,14.61 71.12,14.61 71.12,12.06 72.39,12.06 72.39,4.45 87,4.45
  pour Top (rank 2, no thermals): 69.22,17.78 87,17.78 87,3.81 69.22,3.81
M_B  (via drill 2.29)
  other vias: 20.32,29.85
  pour Top (no thermals): 24.77,31.75 15.88,31.75 15.88,24.77 24.77,24.77
M_B1  (via drill 2.29)
  other vias: 73.66,29.85
  pour Top (no thermals): 78.11,31.75 69.22,31.75 69.22,24.77 78.11,24.77
M_C  (via drill 2.29)
  other vias: 19.69,42.54
  pour Top (no thermals): 24.77,38.73 15.88,38.73 15.88,44.45 24.77,44.45
M_C1  (via drill 2.29)
  other vias: 73.03,42.54
  pour Top (no thermals): 78.11,38.73 69.22,38.73 69.22,44.45 78.11,44.45
N$1
  Bottom 0.203: U1.47 16.66,12.36 16.96,12.06 19.05,12.06 19.05,3.81 R7.1
N$2  (via drill 0.33)
  Top 0.203: v18.42,13.33 15.56,13.33 15.56,3.81 36.83,3.81 R8.1
  Bottom 0.203: U1.45 16.19,13.33 v18.42,13.33
N$3  (via drill 0.33)
  Top 0.203: v4.45,29.21 4.45,37.46 5.08,38.1 v6.35,38.1
  Bottom 0.203: v6.35,38.1 R42.2
  Bottom 0.254: U1.26 7.27,20.36 6.67,20.96 4.45,20.96 v4.45,29.21
N$4
  Bottom 0.203: R7.2 23.5,3.81 R1.2 26.35,6.89 S_AH.1 26.35,7.1 D1.1
N$5
  Bottom 0.203: R9.2 23.5,17.78 R3.2 | R3.2 23.5,20.96 | R3.2 26.35,20.87 S_BH.1 26.35,21.08 D3.1
N$6
  Top 0.203: C22.1 15.3,27.85 15.3,25.4 U2.6
N$7
  Top 0.203: S_BL.1 40.96,21.08 D4.1 37.46,20.09 | R10.2 37.46,20.09 | 37.46,20.09 R4.2
N$8
  Bottom 0.203: U1.3 10.16,8.86 10.79,8.22 10.79,6.67 | 10.79,6.67 R21.1 | 10.79,6.67 R22.1
N$9
  Bottom 0.203: R11.2 23.5,31.75 R5.2 26.35,34.84 S_CH.1 26.35,35.04 D5.1
N$10
  Top 0.203: U3.6 C23.1
N$11
  Top 0.203: S_CL.1 40.96,35.04 D6.1 37.46,34.06 | R12.2 37.46,34.06 | 37.46,34.06 R6.2
N$12
  Bottom 0.203: U1.42 16.71,14.86 16.96,14.61 20,14.61 20,17.78 R9.1
N$13
  Bottom 0.203: U1.48 16.63,11.86 17.15,11.34 C1.1
N$14
  Bottom 0.203: U1.43 16.67,14.36 17.15,13.88 C2.1
N$15
  Bottom 0.203: U1.38 16.71,16.86 17.15,16.42 C3.1
N$16  (via drill 0.33)
  Top 0.203: R10.1 36.83,17.78 18.73,17.78 v18.73,16.51
  Bottom 0.203: v18.73,16.51 18.73,15.88 16.19,15.88 U1.40
N$17
  Bottom 0.203: U1.37 16.75,17.36 16.96,17.15 18.73,17.15 18.73,22.86 18.42,23.18 18.42,31.75 R11.1
N$18
  Top 0.203: S_AL.1 40.96,7.1 D2.1 37.46,6.12 | R8.2 37.46,6.12 | 37.46,6.12 R2.2
N$19  (via drill 0.33)
  Top 0.203: v17.15,31.12 18.42,31.12 18.42,31.75 36.83,31.75 R12.1
  Bottom 0.203: v17.15,31.12 17.15,22.54 17.46,22.23 17.46,19.69 17.97,19.18 17.97,18.42 16.23,18.42 U1.35
N$20  (via drill 0.33)
  Top 0.203: SJ1.2 7.62,12.38 v9.21,12.38
  Bottom 0.203: v9.21,12.38 9.21,12.36 U1.10
N$21  (via drill 0.33)
  Top 0.203: v9.21,15.36 9.21,16.83 SJ1.3
  Bottom 0.203: R15.2 C5.1 5.56,13.56 5.56,15.56 7.1,15.56 7.3,15.36 U1.16 v9.21,15.36 9.21,18.86 U1.23 6.03,18.86 SJ2.1
N$22
  Bottom 0.203: U1.27 9.62,20.86 10.25,21.49 C4.1
N$23
  Bottom 0.203: 8.19,13.86 U1.13 7.3,13.86 7.3,13.3 6.79,12.79 C6.1
N$24
  Bottom 0.203: 8.01,14.36 U1.14 6.35,14.36 C7.2
N$25
  Bottom 0.203: U1.15 6.35,14.86 C7.1
N$26
  Bottom 0.203: R16.2 R15.1 4.76,12.06 7.3,12.06 7.3,12.6 7.56,12.86 U1.11
N$27
  Bottom 0.203: R50.2 76.84,3.81 R28.2 79.69,6.89 S_AH1.1 79.69,7.1 D8.1
N$28
  Bottom 0.203: R52.2 76.84,17.78 R44.2 | R44.2 76.84,20.96 | R44.2 79.69,20.87 S_BH1.1 79.69,21.08 D10.1
N$29
  Bottom 0.203: 17.04,10.36 C8.2
  Bottom 0.254: 17.04,10.36 U1.51 U1.50
  Bottom 0.508: C8.2 18.42,10.25 18.42,6.59 D7.C
  Bottom 0.813: D7.C 16.02,5.33 L1.P$2
N$30
  Bottom 0.203: U1.52 16.6,9.86 16.93,9.53 17.46,9.53 C8.1
N$31
  Bottom 0.203: C11.2 R20.1 U1.2
N$32
  Bottom 0.203: R20.2 C10.2
N$33
  Bottom 0.203: U1.1 7.94,7.85 7.94,6.58 R19.2
N$34
  Bottom 0.203: U1.7 9.53,10.86 9.53,9.53 11.66,9.53 13.88,7.3 R23.1
N$35
  Top 0.203: S_BL1.1 94.3,21.08 D11.1 90.81,20.09 | R53.2 90.81,20.09 | 90.81,20.09 R45.2
N$36
  Bottom 0.254: IC1.2 IC1.1 6.9,38.91 R35.1
N$37
  Bottom 0.203: R54.2 76.84,31.75 R46.2 79.69,34.84 S_CH1.1 79.69,35.04 D12.1
N$38
  Top 0.203: S_CL1.1 94.3,35.04 D13.1 90.81,34.06 | R55.2 90.81,34.06 | 90.81,34.06 R47.2
N$39
  Bottom 0.203: U6.48 69.97,11.86 70.48,11.34 C15.1
N$40
  Bottom 0.203: U6.43 70.01,14.36 70.48,13.88 C16.1
N$41
  Bottom 0.254: IC1.7 IC1.6 10.79,36.83 6.44,36.83 R38.1
N$42
  Bottom 0.254: IC1.8 IC1.9 10.79,35.56 7.71,35.56 R41.1
N$43
  Bottom 0.254: IC1.13 IC1.14 6.35,32.21 6.35,31.66 R32.1
N$44
  Bottom 0.254: R31.2 R30.1 IC1.3
N$45
  Bottom 0.203: U6.38 70.05,16.86 70.48,16.42 C17.1
N$46
  Bottom 0.254: R33.1 R34.2 IC1.10
N$47
  Bottom 0.254: R36.1 R37.2 IC1.5
N$48
  Bottom 0.254: IC1.12 R39.1 R40.2
N$49
  Top 0.203: S_AL1.1 94.3,7.1 D9.1 90.81,6.12 | R51.2 90.81,6.12 | 90.81,6.12 R29.2
N$50
  Bottom 0.203: U6.47 70.01,12.36 70.29,12.06 72.39,12.06 72.39,3.81 R50.1
N$51  (via drill 0.33)
  Top 0.203: v71.76,13.33 68.9,13.33 68.9,3.81 90.17,3.81 R51.1
  Bottom 0.203: U6.45 69.53,13.33 v71.76,13.33
N$52
  Bottom 0.203: U6.42 70.04,14.86 70.29,14.61 73.34,14.61 73.34,17.78 R52.1
N$53  (via drill 0.33)
  Top 0.203: R53.1 90.17,17.78 72.07,17.78 v72.07,16.51
  Bottom 0.203: v72.07,16.51 72.07,15.88 69.53,15.88 U6.40
N$54
  Bottom 0.203: U6.37 70.09,17.36 70.29,17.15 72.07,17.15 72.07,22.86 71.76,23.18 71.76,31.75 R54.1
N$55  (via drill 0.33)
  Top 0.203: v70.48,31.12 71.76,31.12 71.76,31.75 90.17,31.75 R55.1
  Bottom 0.203: v70.48,31.12 70.48,22.54 70.8,22.23 70.8,19.69 71.31,19.18 71.31,18.42 69.57,18.42 U6.35
N$56  (via drill 0.33)
  Top 0.203: SJ4.2 60.96,12.38 v62.55,12.38
  Bottom 0.203: v62.55,12.38 62.55,12.36 U6.10
N$57  (via drill 0.33)
  Top 0.203: v62.55,15.36 62.55,16.83 SJ4.3
  Bottom 0.203: R56.2 C42.1 58.9,13.56 58.9,15.56 60.44,15.56 60.64,15.36 U6.16 v62.55,15.36 62.55,18.86 U6.23 59.37,18.86 SJ3.1
N$58
  Bottom 0.203: U6.27 62.95,20.86 63.59,21.49 C41.1
N$59
  Bottom 0.203: 61.53,13.86 U6.13 60.64,13.86 60.64,13.3 60.13,12.79 C43.1
N$60
  Bottom 0.203: 61.34,14.36 U6.14 59.69,14.36 C44.2
N$61
  Bottom 0.203: U6.15 59.69,14.86 C44.1
N$62
  Bottom 0.203: R57.2 R56.1 58.1,12.06 60.64,12.06 60.64,12.6 60.9,12.86 U6.11
N$63
  Bottom 0.203: 70.38,10.36 C45.2
  Bottom 0.254: 70.38,10.36 U6.51 U6.50
  Bottom 0.508: C45.2 71.76,10.25 71.76,6.59 D14.C
  Bottom 0.813: D14.C 69.36,5.33 L2.P$2
N$64
  Bottom 0.203: U6.52 69.94,9.86 70.27,9.53 70.8,9.53 C45.1
N$65
  Bottom 0.203: C48.2 R61.1 U6.2
N$66
  Bottom 0.203: R61.2 C47.2
N$67
  Bottom 0.203: U6.1 61.28,7.85 61.28,6.58 R60.2
N$68
  Bottom 0.203: U6.3 63.5,8.86 64.14,8.22 64.14,6.67 | 64.14,6.67 R62.1 | 64.14,6.67 R63.1
N$69
  Bottom 0.203: U6.7 62.86,10.86 62.86,9.53 65,9.53 67.22,7.3 R64.1
N$70
  Bottom 0.254: IC2.2 IC2.1 60.24,38.91 R74.1
N$71
  Bottom 0.254: IC2.7 IC2.6 64.14,36.83 59.78,36.83 R77.1
N$72
  Bottom 0.254: IC2.8 IC2.9 64.14,35.56 61.05,35.56 R80.1
N$73
  Bottom 0.254: IC2.13 IC2.14 59.69,32.21 59.69,31.66 R71.1
N$74
  Bottom 0.254: R70.2 R69.1 IC2.3
N$75
  Bottom 0.254: R72.1 R73.2 IC2.10
N$76
  Bottom 0.254: R75.1 R76.2 IC2.5
N$77
  Bottom 0.254: IC2.12 R78.1 R79.2
N$78  (via drill 0.33)
  Top 0.203: v57.78,29.21 57.78,37.46 58.42,38.1 v59.69,38.1
  Bottom 0.203: v59.69,38.1 R81.2
  Bottom 0.254: U6.26 60.61,20.36 60.01,20.96 57.78,20.96 v57.78,29.21
N$79
  Top 0.203: C56.1 68.64,27.85 68.64,25.4 U8.6
N$80
  Top 0.203: U7.6 C57.1
PWM_A
  Bottom 0.203: JP1.3 1.91,11.43 3.17,12.7 3.17,14.61 4.55,15.98 7.2,15.98 7.32,15.86 U1.17
PWM_A1
  Bottom 0.203: JP3.3 55.24,11.43 56.52,12.7 56.52,14.61 57.89,15.98 60.54,15.98 60.66,15.86 U6.17
PWM_B
  Bottom 0.203: JP1.5 2.88,16.86 U1.19
PWM_B1
  Bottom 0.203: JP3.5 56.23,16.86 U6.19
PWM_C
  Bottom 0.203: JP1.7 3.17,19.69 3.17,17.86 U1.21
PWM_C1
  Bottom 0.203: JP3.7 56.52,19.69 56.52,17.86 U6.21
R_B  (via drill 0.33)
  Bottom 0.203: C2.2 17.15,15.36 | 17.15,15.36 U1.41 | 17.15,15.36 19.37,15.36 19.37,19.05 | R33.2 16.51,30.39 16.51,32.38 20,32.38 20.64,33.02 21.59,33.02 22.23,32.38 22.23,31.75
  other vias: 33.02,31.12 32.38,30.48 33.02,29.85 32.38,29.21 33.02,28.58 32.38,27.94 33.02,27.31 32.38,26.67 33.02,26.04 32.38,25.4 33.02,24.77 32.38,24.13 33.02,23.5 32.38,22.86 33.02,22.23 32.38,21.59 33.02,20.96 32.38,20.32 33.02,19.69 32.38,19.05 31.75,31.12 31.12,30.48 31.75,29.85 31.12,29.21 31.75,28.58 31.12,27.94 31.75,27.31 31.12,26.67 31.75,26.04 31.12,25.4 31.75,24.77 31.12,24.13 31.75,23.5 31.12,22.86 31.75,22.23 31.12,21.59 31.75,20.96 31.12,20.32 31.75,19.69 31.12,19.05 30.48,19.69 29.85,19.05 28.58,20.32 29.21,19.69 28.58,19.05 30.48,31.12 29.85,30.48 30.48,29.85 29.85,29.21 30.48,28.58 29.85,27.94 30.48,27.31 29.85,26.67 30.48,26.04 29.85,25.4 30.48,24.77 29.21,31.12 28.58,30.48 29.21,29.85 28.58,29.21 29.21,28.58 28.58,27.94 29.21,27.31 28.58,26.67 29.21,26.04 28.58,25.4 29.21,24.77 28.58,24.13 30.48,22.23 29.21,22.23 28.58,22.86 27.94,31.12 27.31,30.48 26.67,31.12 26.04,30.48 25.4,31.12 25.4,29.85 26.67,29.85 27.94,29.85 27.94,24.77 26.67,24.77 25.4,24.77 27.94,19.69 27.31,19.05 26.67,19.69 26.04,19.05 25.4,19.69 24.77,19.05 24.13,19.69 22.86,19.69 22.23,19.05 22.23,20.32 21.59,19.69 20.96,20.32 20.96,19.05 20.32,19.69 19.69,19.05 19.69,20.32 19.69,21.59 23.5,24.13 24.13,23.5 22.86,23.5 22.23,24.13 21.59,23.5 20.96,24.13 20.32,20.96
  pour Bottom (rank 2, no thermals): 33.66,31.75 18.42,31.75 18.42,18.42 33.66,18.42
  pour Top (rank 2, no thermals): 24.77,31.75 33.66,31.75 33.66,18.42 15.88,18.42 15.88,24.77 24.77,24.77
R_B1  (via drill 0.33)
  Bottom 0.203: C16.2 70.48,15.36 | 70.48,15.36 U6.41 | 70.48,15.36 72.71,15.36 72.71,19.05 | R72.2 69.85,30.39 69.85,32.38 73.34,32.38 73.98,33.02 74.93,33.02 75.57,32.38 75.57,31.75
  other vias: 86.36,31.12 85.73,30.48 86.36,29.85 85.73,29.21 86.36,28.58 85.73,27.94 86.36,27.31 85.73,26.67 86.36,26.04 85.73,25.4 86.36,24.77 85.73,24.13 86.36,23.5 85.73,22.86 86.36,22.23 85.73,21.59 86.36,20.96 85.73,20.32 86.36,19.69 85.73,19.05 85.09,31.12 84.45,30.48 85.09,29.85 84.45,29.21 85.09,28.58 84.45,27.94 85.09,27.31 84.45,26.67 85.09,26.04 84.45,25.4 85.09,24.77 84.45,24.13 85.09,23.5 84.45,22.86 85.09,22.23 84.45,21.59 85.09,20.96 84.45,20.32 85.09,19.69 84.45,19.05 83.82,19.69 83.19,19.05 81.92,20.32 82.55,19.69 81.92,19.05 83.82,31.12 83.19,30.48 83.82,29.85 83.19,29.21 83.82,28.58 83.19,27.94 83.82,27.31 83.19,26.67 83.82,26.04 83.19,25.4 83.82,24.77 82.55,31.12 81.92,30.48 82.55,29.85 81.92,29.21 82.55,28.58 81.92,27.94 82.55,27.31 81.92,26.67 82.55,26.04 81.92,25.4 82.55,24.77 81.92,24.13 83.82,22.23 82.55,22.23 81.92,22.86 81.28,31.12 80.65,30.48 80.01,31.12 79.38,30.48 78.74,31.12 78.74,29.85 80.01,29.85 81.28,29.85 81.28,24.77 80.01,24.77 78.74,24.77 81.28,19.69 80.65,19.05 80.01,19.69 79.38,19.05 78.74,19.69 78.11,19.05 77.47,19.69 76.2,19.69 75.57,19.05 75.57,20.32 74.93,19.69 74.3,20.32 74.3,19.05 73.66,19.69 73.03,19.05 73.03,20.32 73.03,21.59 76.84,24.13 77.47,23.5 76.2,23.5 75.57,24.13 74.93,23.5 74.3,24.13 73.66,20.96
  pour Bottom (rank 2, no thermals): 87,31.75 71.76,31.75 71.76,18.42 87,18.42
  pour Top (rank 2, no thermals): 78.11,31.75 87,31.75 87,18.42 69.22,18.42 69.22,24.77 78.11,24.77
R_C  (via drill 0.33)
  Top 0.203: v17.78,31.75 17.78,33.02
  Bottom 0.203: U1.36 17.13,17.86 C3.2 18.35,17.87 18.35,19.43 18.1,19.69 18.1,22.54 17.78,22.86 v17.78,31.75 | R36.2 17.15,42
  other vias: 33.02,43.81 32.38,43.18 33.02,42.54 32.38,41.91 33.02,41.27 32.38,40.64 33.02,40 32.38,39.37 33.02,38.73 32.38,38.1 33.02,37.46 32.38,36.83 33.02,36.2 32.38,35.56 33.02,34.92 32.38,34.29 33.02,33.66 32.38,33.02 31.12,33.02 31.75,43.81 31.12,43.18 31.75,42.54 31.12,41.91 31.75,41.27 31.12,40.64 31.75,40 31.12,39.37 31.75,38.73 31.12,38.1 31.75,37.46 31.12,36.83 31.75,36.2 31.12,35.56 31.75,34.92 31.12,34.29 31.75,33.66 30.48,43.81 29.85,43.18 30.48,42.54 29.85,41.91 30.48,41.27 29.85,40.64 30.48,40 29.85,39.37 30.48,38.73 30.48,36.2 30.48,33.66 29.85,33.02 28.58,33.02 29.21,43.81 28.58,43.18 29.21,42.54 28.58,41.91 29.21,41.27 28.58,40.64 29.21,40 28.58,39.37 29.21,38.73 28.58,38.1 28.58,36.83 29.21,36.2 28.58,34.29 29.21,33.66 27.94,43.81 26.67,43.81 25.4,43.81 27.94,38.73 26.67,38.73 25.4,38.73 27.94,33.66 27.31,33.02 26.67,33.66 26.04,33.02 25.4,33.66 24.77,33.02 24.13,33.66 22.86,33.66 22.23,34.29 21.59,33.66 20.96,34.29 20.32,33.66 19.69,34.29 19.05,33.66 18.42,34.29 17.78,33.66 17.78,34.92 19.05,34.92 19.69,35.56 18.42,35.56 24.13,38.1 23.5,37.46 22.86,38.1 22.23,37.46 21.59,38.1 20.96,37.46 19.69,33.02 17.15,35.56 17.15,34.29 20.32,34.92 18.42,33.02
  pour Bottom (rank 2, no thermals): 33.66,44.45 16.51,44.45 16.51,32.38 33.66,32.38
  pour Top (rank 2, no thermals): 24.77,44.45 33.66,44.45 33.66,32.07 15.88,32.07 15.88,38.73 24.77,38.73
R_C1  (via drill 0.33)
  Top 0.203: v71.12,31.75 71.12,33.02
  Bottom 0.203: U6.36 70.47,17.86 C17.2 71.69,17.87 71.69,19.43 71.44,19.69 71.44,22.54 71.12,22.86 v71.12,31.75 | R75.2 70.48,42
  other vias: 86.36,43.81 85.73,43.18 86.36,42.54 85.73,41.91 86.36,41.27 85.73,40.64 86.36,40 85.73,39.37 86.36,38.73 85.73,38.1 86.36,37.46 85.73,36.83 86.36,36.2 85.73,35.56 86.36,34.92 85.73,34.29 86.36,33.66 85.73,33.02 84.45,33.02 85.09,43.81 84.45,43.18 85.09,42.54 84.45,41.91 85.09,41.27 84.45,40.64 85.09,40 84.45,39.37 85.09,38.73 84.45,38.1 85.09,37.46 84.45,36.83 85.09,36.2 84.45,35.56 85.09,34.92 84.45,34.29 85.09,33.66 83.82,43.81 83.19,43.18 83.82,42.54 83.19,41.91 83.82,41.27 83.19,40.64 83.82,40 83.19,39.37 83.82,38.73 83.82,36.2 83.82,33.66 83.19,33.02 81.92,33.02 82.55,43.81 81.92,43.18 82.55,42.54 81.92,41.91 82.55,41.27 81.92,40.64 82.55,40 81.92,39.37 82.55,38.73 81.92,38.1 81.92,36.83 82.55,36.2 81.92,34.29 82.55,33.66 81.28,43.81 80.01,43.81 78.74,43.81 81.28,38.73 80.01,38.73 78.74,38.73 81.28,33.66 80.65,33.02 80.01,33.66 79.38,33.02 78.74,33.66 78.11,33.02 77.47,33.66 76.2,33.66 75.57,34.29 74.93,33.66 74.3,34.29 73.66,33.66 73.03,34.29 72.39,33.66 71.76,34.29 71.12,33.66 71.12,34.92 72.39,34.92 73.03,35.56 71.76,35.56 77.47,38.1 76.84,37.46 76.2,38.1 75.57,37.46 74.93,38.1 74.3,37.46 73.03,33.02 70.48,35.56 70.48,34.29 73.66,34.92 71.76,33.02
  pour Bottom (rank 2, no thermals): 87,44.45 69.85,44.45 69.85,32.38 87,32.38
  pour Top (rank 2, no thermals): 78.11,44.45 87,44.45 87,32.07 69.22,32.07 69.22,38.73 78.11,38.73
V+  (via drill 0.33)
  Top 0.254: v14.61,8.26 14.61,3.17 v19.69,3.17
  Bottom 0.203: R30.2 8.89,43.81 9.53,44.45 38.1,44.45 S_CH.4
  Bottom 0.254: U1.29 14.48,21.36 14.48,9.36 U1.53 U1.54 14.61,8.86 v14.61,8.26
  other vias: 43.81,24.13 43.81,25.4 45.09,25.4 45.09,39.37 44.45,38.73 43.81,38.1 43.81,10.16 45.09,38.1 45.09,24.13 41.91,32.38 41.91,31.12 41.27,17.78 41.91,18.42 41.91,17.15 44.45,10.79 43.81,11.43 45.09,10.16 45.09,11.43 44.45,24.77 43.81,39.37 41.27,31.75 42.54,1.91 40,1.91 37.46,1.91 34.92,1.91 32.38,1.91
  pour Bottom (rank 5, no thermals): 33.66,44.45 46.35,44.45 46.35,41.91 46.04,41.59 46.04,0 19.05,0 19.05,4.45 33.66,4.45
  pour Top (rank 4, no thermals): 45.4,26.04 45.4,23.5 43.5,23.5 43.5,26.04
  pour Top (rank 4, no thermals): 43.5,37.46 43.5,40 45.4,40 45.4,37.46
  pour Top (rank 4, no thermals): 40.96,16.83 42.23,16.83 42.23,18.73 40.96,18.73
  pour Top (rank 4, no thermals): 43.5,9.53 43.5,12.06 45.4,12.06 45.4,9.53
  pour Top (rank 4, no thermals): 42.23,30.8 40.96,30.8 40.96,32.7 42.23,32.7
V+1  (via drill 0.33)
  Top 0.254: v67.95,8.26 67.95,3.17 v73.03,3.17
  Bottom 0.203: R69.2 62.23,43.81 62.86,44.45 91.44,44.45 S_CH1.4
  Bottom 0.254: U6.29 67.82,21.36 67.82,9.36 U6.53 U6.54 67.95,8.86 v67.95,8.26
  other vias: 97.16,24.13 97.16,25.4 98.43,25.4 98.43,39.37 97.79,38.73 97.16,38.1 97.16,10.16 98.43,38.1 98.43,24.13 95.25,32.38 95.25,31.12 94.62,17.78 95.25,18.42 95.25,17.15 97.79,10.79 97.16,11.43 98.43,10.16 98.43,11.43 97.79,24.77 97.16,39.37 94.62,31.75 95.89,1.91 93.34,1.91 90.81,1.91 88.27,1.91 85.73,1.91
  pour Bottom (rank 5, no thermals): 87,44.45 99.7,44.45 99.7,41.91 99.38,41.59 99.38,0 72.39,0 72.39,4.45 87,4.45
  pour Top (rank 4, no thermals): 98.74,26.04 98.74,23.5 96.84,23.5 96.84,26.04
  pour Top (rank 4, no thermals): 96.84,37.46 96.84,40 98.74,40 98.74,37.46
  pour Top (rank 4, no thermals): 94.3,16.83 95.57,16.83 95.57,18.73 94.3,18.73
  pour Top (rank 4, no thermals): 96.84,9.53 96.84,12.06 98.74,12.06 98.74,9.53
  pour Top (rank 4, no thermals): 95.57,30.8 94.3,30.8 94.3,32.7 95.57,32.7
V-  (via drill 0.33)
  Top 0.203: v16.51,29.21 v16.51,33.02
  Bottom 0.203: U1.31 16.83,20.36 16.83,21.91 16.51,22.23 v16.51,29.21 10.16,29.21 | 10.16,29.21 R34.1 | 10.16,29.21 7.62,29.21 R40.1 | 10.16,41.27 7.62,41.27 R31.1 7.62,45.09 | 10.16,41.27 R37.1 | v16.51,33.02 16.51,41.27 10.16,41.27
  other vias: 33.02,48.26 32.38,47.62 33.02,46.99 32.38,46.35 33.02,45.72 32.38,45.09 29.21,45.72 28.58,45.09 29.21,46.99 28.58,46.35 28.58,47.62 29.21,48.26 22.23,45.09 21.59,45.72 22.23,46.35 21.59,46.99 22.23,47.62 21.59,48.26 23.5,45.09 22.86,45.72 23.5,46.35 22.86,46.99 23.5,47.62 22.86,48.26 24.77,45.09 24.13,45.72 24.77,46.35 24.13,46.99 24.77,47.62 24.13,48.26 26.04,45.09 25.4,45.72 26.04,46.35 25.4,46.99 26.04,47.62 25.4,48.26 27.31,45.09 26.67,45.72 27.31,46.35 26.67,46.99 27.31,47.62 26.67,48.26 27.94,45.72 27.94,46.99 27.94,48.26 17.15,47.62 14.61,47.62 12.06,47.62 9.53,47.62 6.98,47.62
  pour Top (rank 3, no thermals): 4.45,49.53 33.5,49.53 33.5,44.6 4.45,44.6
  pour Bottom (rank 3, no thermals): 4.45,49.53 33.5,49.53 33.5,44.6 4.45,44.6
V-1  (via drill 0.33)
  Top 0.203: v69.85,29.21 v69.85,33.02
  Bottom 0.203: U6.31 70.17,20.36 70.17,21.91 69.85,22.23 v69.85,29.21 63.5,29.21 | 63.5,29.21 R73.1 | 63.5,29.21 60.96,29.21 R79.1 | 63.5,41.27 60.96,41.27 R70.1 60.96,45.09 | 63.5,41.27 R76.1 | v69.85,33.02 69.85,41.27 63.5,41.27
  other vias: 86.36,48.26 85.73,47.62 86.36,46.99 85.73,46.35 86.36,45.72 85.73,45.09 82.55,45.72 81.92,45.09 82.55,46.99 81.92,46.35 81.92,47.62 82.55,48.26 75.57,45.09 74.93,45.72 75.57,46.35 74.93,46.99 75.57,47.62 74.93,48.26 76.84,45.09 76.2,45.72 76.84,46.35 76.2,46.99 76.84,47.62 76.2,48.26 78.11,45.09 77.47,45.72 78.11,46.35 77.47,46.99 78.11,47.62 77.47,48.26 79.38,45.09 78.74,45.72 79.38,46.35 78.74,46.99 79.38,47.62 78.74,48.26 80.65,45.09 80.01,45.72 80.65,46.35 80.01,46.99 80.65,47.62 80.01,48.26 81.28,45.72 81.28,46.99 81.28,48.26 70.48,47.62 67.95,47.62 65.41,47.62 62.86,47.62 60.32,47.62
  pour Top (rank 3, no thermals): 57.78,49.53 86.84,49.53 86.84,44.6 57.78,44.6
  pour Bottom (rank 3, no thermals): 57.78,49.53 86.84,49.53 86.84,44.6 57.78,44.6
V_A
  Bottom 0.254: C18.2 3.72,31.12 | 3.72,31.12 JP1.11 | R32.2 3.72,31.12
V_A1
  Bottom 0.254: C51.2 57.06,31.12 | 57.06,31.12 JP3.11 | R71.2 57.06,31.12
V_B
  Bottom 0.254: C21.2 3.72,33.66 | 3.72,33.66 JP1.12 | 3.72,33.66 R41.2
V_B1
  Bottom 0.254: C54.2 57.06,33.66 | 57.06,33.66 JP3.12 | 57.06,33.66 R80.2
V_C
  Bottom 0.254: C20.2 3.72,36.2 | 3.72,36.2 JP1.13 | 3.72,36.2 R38.2
V_C1
  Bottom 0.254: C53.2 57.06,36.2 | 57.06,36.2 JP3.13 | 57.06,36.2 R77.2
V_LOW  (via drill 0.33)
  Top 0.203: v17.15,19.05 17.15,18.42 34.29,18.42
  Bottom 0.203: U1.30 14.86,20.86 14.86,18.86 | 14.86,18.86 U1.34 17.15,18.86 v17.15,19.05 | 14.86,18.86 14.86,16.36 | 14.86,16.36 U1.39 | 14.86,16.36 14.86,13.86 U1.44
  other vias: 34.29,48.26 34.92,47.62 34.29,46.99 34.92,46.35 34.29,45.72 34.92,45.09 38.73,45.09 38.1,45.72 38.73,46.35 38.1,46.99 38.73,47.62 38.1,48.26 40,45.09 39.37,45.72 40,46.35 39.37,46.99 40,47.62 39.37,48.26 41.27,45.09 40.64,45.72 41.27,46.35 40.64,46.99 41.27,47.62 40.64,48.26 42.54,45.09 41.91,45.72 42.54,46.35 41.91,46.99 42.54,47.62 41.91,48.26 43.18,45.72 43.81,46.35 43.18,46.99 43.81,47.62 43.18,48.26 44.45,45.72 45.09,46.35 44.45,46.99 45.09,47.62 44.45,48.26 45.72,45.72 45.72,46.99 45.72,48.26 43.81,45.09 45.09,45.09 43.81,7.3 45.09,7.3 45.09,42.23 45.09,35.24 44.45,42.86 45.09,28.26 43.81,28.26 43.81,42.23 43.81,21.27 44.45,34.61 44.45,18.42 44.45,17.15 45.09,17.78 44.45,14.92 43.81,14.29 45.09,14.29 44.45,20.64 45.09,21.27 43.81,35.24 44.45,6.67 44.45,28.89 44.45,31.12 45.09,31.75 44.45,32.38
  pour Top (rank 5, no thermals): 33.5,49.53 33.66,3.81 44.13,3.81 47.31,6.98 47.31,41.91 46.35,42.86 46.35,47.62 47.62,47.62 47.62,49.53
  pour Bottom (rank 4, no thermals): 33.5,49.53 47.62,49.53 47.62,47.62 46.35,47.62 46.35,44.45 33.5,44.45
  pour Bottom (rank 4, no thermals): 45.4,15.24 43.5,15.24 43.5,13.97 45.4,13.97
  pour Bottom (rank 4, no thermals): 43.5,6.35 45.4,6.35 45.4,7.62 43.5,7.62
  pour Bottom (rank 4, no thermals): 45.4,29.21 43.5,29.21 43.5,27.94 45.4,27.94
  pour Bottom (rank 4, no thermals): 43.5,34.29 45.4,34.29 45.4,35.56 43.5,35.56
  pour Bottom (rank 4, no thermals): 43.5,41.91 46.35,41.91 46.35,44.45 43.5,44.45
  pour Bottom (rank 4, no thermals): 44.13,32.7 44.13,30.8 45.4,30.8 45.4,32.7
  pour Bottom (rank 4, no thermals): 45.4,21.59 43.5,21.59 43.5,20.32 45.4,20.32
  pour Top (rank 4, no thermals): 44.13,18.73 45.4,18.73 45.4,16.83 44.13,16.83
  pour Bottom (rank 4, no thermals): 45.4,16.83 45.4,18.73 44.13,18.73 44.13,16.83
V_LOW1  (via drill 0.33)
  Top 0.203: v70.48,19.05 70.48,18.42 87.63,18.42
  Bottom 0.203: U6.30 68.2,20.86 68.2,18.86 | 68.2,18.86 U6.34 70.48,18.86 v70.48,19.05 | 68.2,18.86 68.2,16.36 | 68.2,16.36 U6.39 | 68.2,16.36 68.2,13.86 U6.44
  other vias: 87.63,48.26 88.27,47.62 87.63,46.99 88.27,46.35 87.63,45.72 88.27,45.09 92.08,45.09 91.44,45.72 92.08,46.35 91.44,46.99 92.08,47.62 91.44,48.26 93.34,45.09 92.71,45.72 93.34,46.35 92.71,46.99 93.34,47.62 92.71,48.26 94.62,45.09 93.98,45.72 94.62,46.35 93.98,46.99 94.62,47.62 93.98,48.26 95.89,45.09 95.25,45.72 95.89,46.35 95.25,46.99 95.89,47.62 95.25,48.26 96.52,45.72 97.16,46.35 96.52,46.99 97.16,47.62 96.52,48.26 97.79,45.72 98.43,46.35 97.79,46.99 98.43,47.62 97.79,48.26 99.06,45.72 99.06,46.99 99.06,48.26 97.16,45.09 98.43,45.09 97.16,7.3 98.43,7.3 98.43,42.23 98.43,35.24 97.79,42.86 98.43,28.26 97.16,28.26 97.16,42.23 97.16,21.27 97.79,34.61 97.79,18.42 97.79,17.15 98.43,17.78 97.79,14.92 97.16,14.29 98.43,14.29 97.79,20.64 98.43,21.27 97.16,35.24 97.79,6.67 97.79,28.89 97.79,31.12 98.43,31.75 97.79,32.38
  pour Top (rank 5, no thermals): 86.84,49.53 87,3.81 97.47,3.81 100.65,6.98 100.65,41.91 99.7,42.86 99.7,47.62 100.97,47.62 100.97,49.53
  pour Bottom (rank 4, no thermals): 86.84,49.53 100.97,49.53 100.97,47.62 99.7,47.62 99.7,44.45 86.84,44.45
  pour Bottom (rank 4, no thermals): 98.74,15.24 96.84,15.24 96.84,13.97 98.74,13.97
  pour Bottom (rank 4, no thermals): 96.84,6.35 98.74,6.35 98.74,7.62 96.84,7.62
  pour Bottom (rank 4, no thermals): 98.74,29.21 96.84,29.21 96.84,27.94 98.74,27.94
  pour Bottom (rank 4, no thermals): 96.84,34.29 98.74,34.29 98.74,35.56 96.84,35.56
  pour Bottom (rank 4, no thermals): 96.84,41.91 99.7,41.91 99.7,44.45 96.84,44.45
  pour Bottom (rank 4, no thermals): 97.47,32.7 97.47,30.8 98.74,30.8 98.74,32.7
  pour Bottom (rank 4, no thermals): 98.74,21.59 96.84,21.59 96.84,20.32 98.74,20.32
  pour Top (rank 4, no thermals): 97.47,18.73 98.74,18.73 98.74,16.83 97.47,16.83
  pour Bottom (rank 4, no thermals): 98.74,16.83 98.74,18.73 97.47,18.73 97.47,16.83
V_P
  Bottom 0.254: C19.2 3.72,41.27 | 3.72,41.27 JP1.15 | 3.72,41.27 R35.2
V_P1
  Bottom 0.254: C52.2 57.06,41.27 | 57.06,41.27 JP3.15 | 57.06,41.27 R74.2
VCC  (via drill 0.33)
  Top 0.203: U4.3 6.35,22.85 6.35,24.15 U4.1 4.52,24.15 C12.1
  Top 0.254: 6.35,22.85 v6.35,3.17
  Bottom 0.203: R21.2 8.8,5.17 10.27,3.71 L1.P$1
  Bottom 0.254: C9.1 v6.35,3.17
  Bottom 0.813: L1.P$1 C9.1
VCC1  (via drill 0.33)
  Top 0.203: U9.3 59.69,22.85 59.69,24.15 U9.1 57.86,24.15 C49.1
  Top 0.254: 59.69,22.85 v59.69,3.17
  Bottom 0.203: R62.2 62.14,5.17 63.6,3.71 L2.P$1
  Bottom 0.254: C46.1 v59.69,3.17
  Bottom 0.813: L2.P$1 C46.1

## Text on the board
tPlace: VP | VP | IP | IP | VC | VC | VB | VB | VA | VA | IC | IC | IB | IB
bPlace: - | - | GND | GND | C | C | IC | IC | IB | IB | B | B | !C | !C | !B | !B | !A | !A | C | C | B | B | A | A | A | A | 5 | 5 | + | +
tStop: 03/2012 | 03/2012
bStop: Tiny | Tiny | v2.1 | Husk | v2.1 | Husk